# EAGLE board SpringReverbPanel1 (EAGLE 7.2.0)
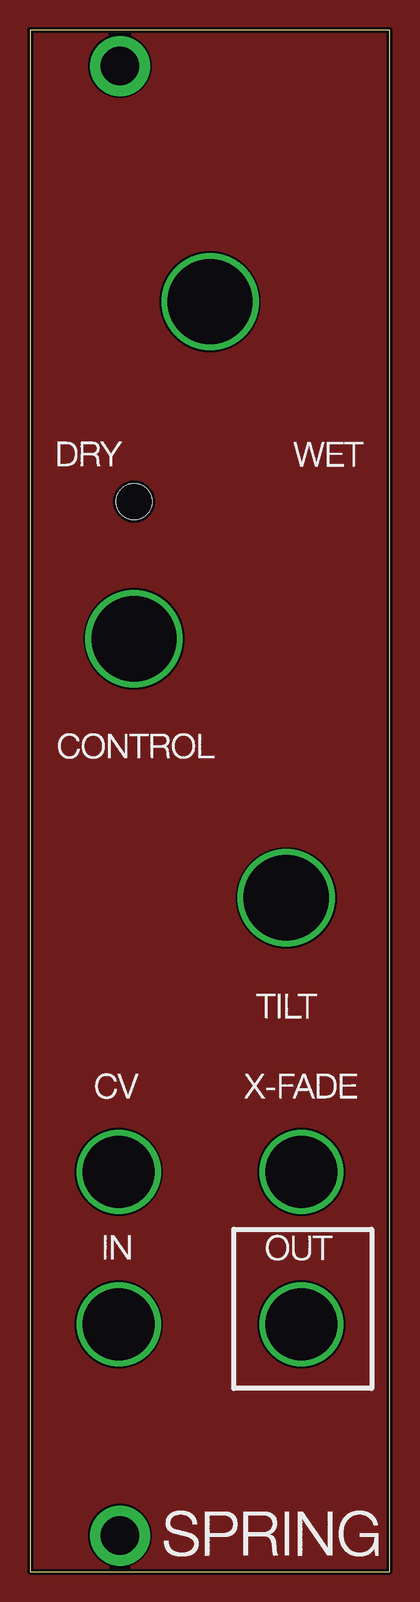
[diagram p0: board, top side]
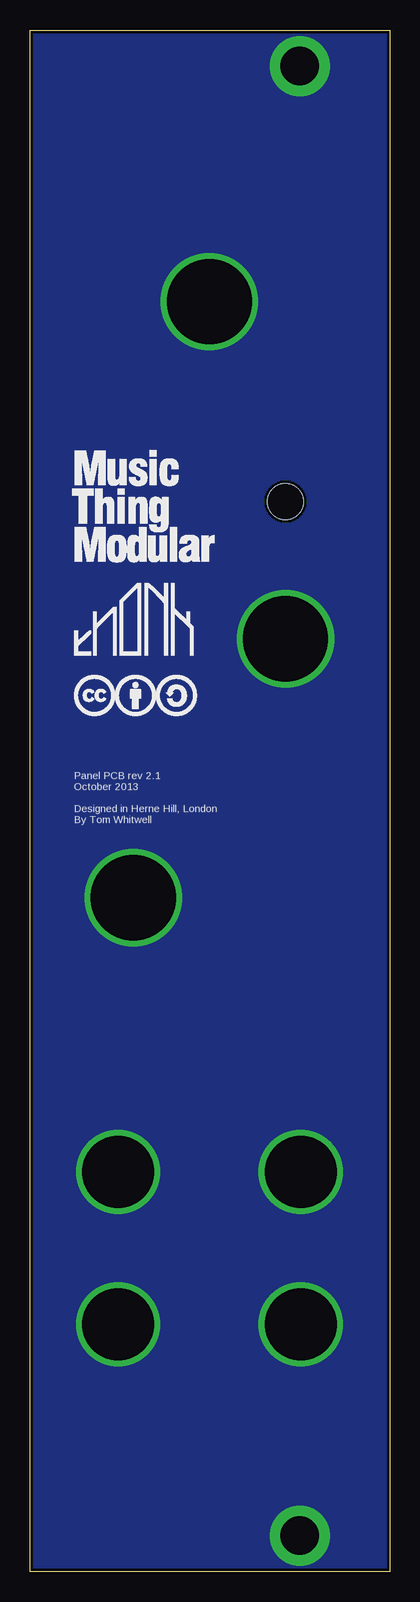
[diagram p1: board, bottom side, seen from below]

Size 30 x 128.5 mm. Coordinates in mm from the lower left corner, seen from the top.
Outline: 0,0 30,0 30,128.5 0,128.5 0,0
Copper layers (1*2*15*16): Top 0.035mm / dielectric 0.2mm / Route2 0.0175mm / dielectric 1.1mm / Route15 0.0175mm / dielectric 0.2mm / Bottom 0.035mm
Design rules "SeeedStudio_DRU_no_angle_20130527": minimum track width 6mil, minimum drill 12mil, track to track 6mil, track to pad 6mil, pad to pad 6mil, via to via 6mil, smd to smd 0mil, copper to edge 10mil, drill to drill 10mil, minimum pad ring 6mil, minimum via ring 6mil, stop-mask expansion 2mil, vias tented up to drill 25mil, thermal gap 10mil
Holes 3 mm at 8.68,89.18

## Placement (x,y rotation side)
U$1  [MTM_1CM_KEEPOUT]  17.44,118.48 0 top
U$2  [THONK_1CM_SCREENPRINT]  26.29,76.37 0 bottom
U$3  [CC_1CM_SCREENPRINT]  26.31,71.32 0 bottom
U$4  [MTM_1CM]  26.55,83.66 0 bottom

## Library data of the parts
U$1-U$4 = TW_logos

## Tracks (layer width: path | path; a pad name or v marks a point on that pad's centre or on a via)
GND  (via drill 3.2 pad 5, 6, 7.1)
  other vias: 7.5,3 7.5,125.5 22.65,33.3 7.41,33.3 22.65,20.6 7.41,20.6 21.38,56.16 8.68,77.75 15.03,105.85
  pour Bottom: -2.5,132 34.5,132 35.5,-5.5 -2.5,-4
N$2
  pour Top: -8.59,137.48 41.88,137.48 41.88,134.05 41.88,-12.37 -11.67,-12.37 -11.67,134.39

## Text on the board
bPlace: Panel PCB rev 2.1 / October 2013 / / Designed in Herne Hill, London / By Tom Whitwell